# Allegro board unnamed.brd
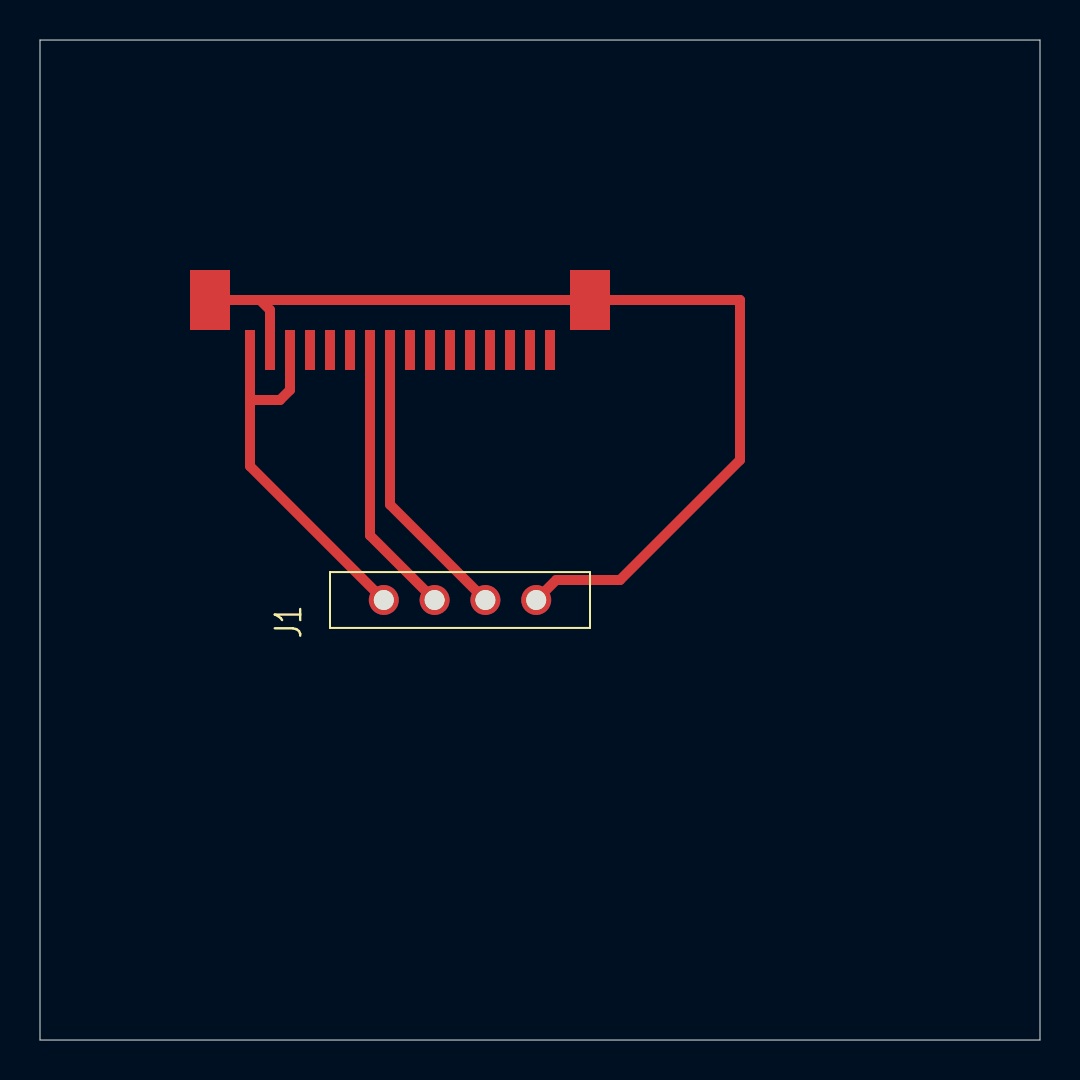
[diagram p0: board, top side]
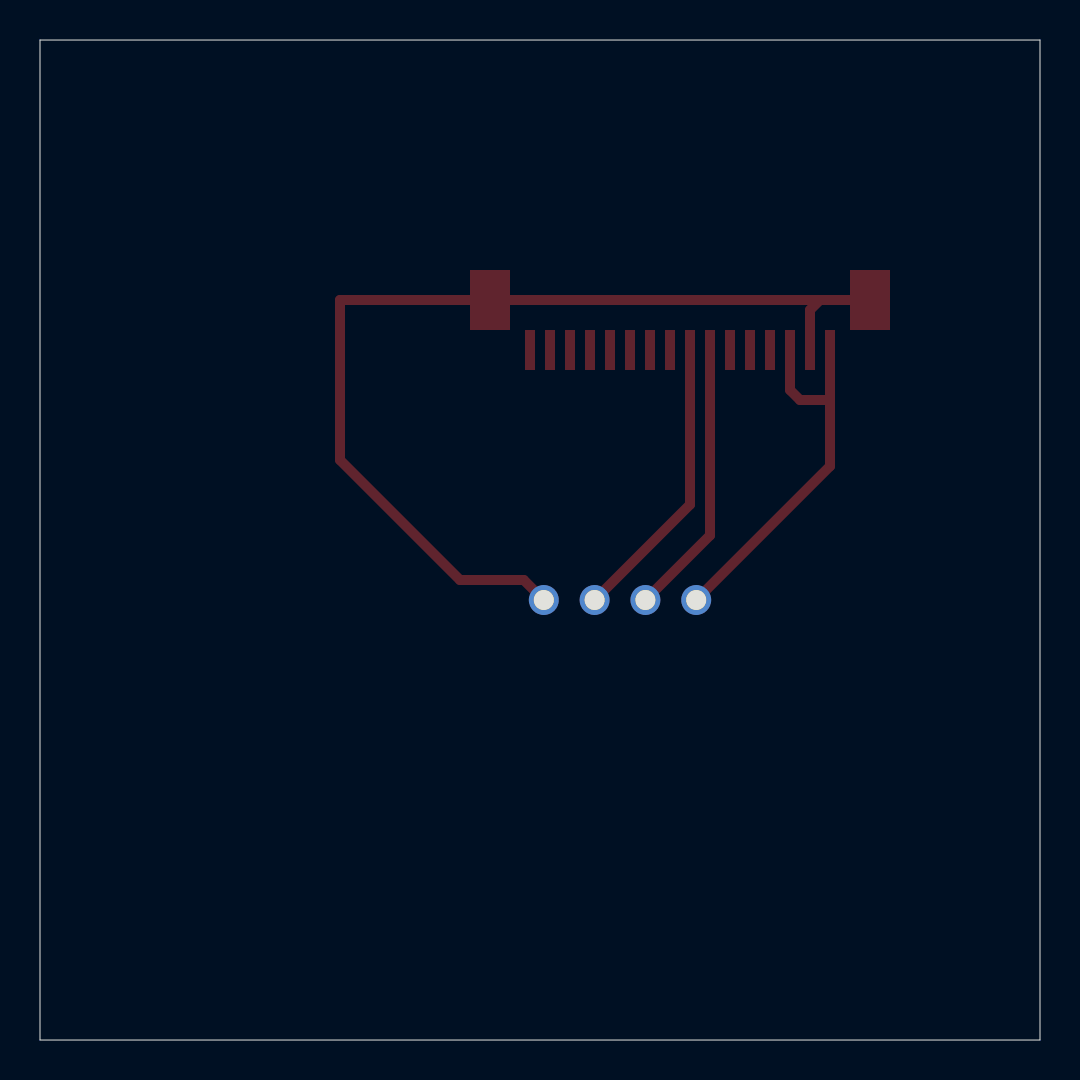
[diagram p1: board, bottom side, seen from below]

Outline 50 x 50 mm; copper layers: TOP, BOTTOM. Coordinates in mm from the lower left corner of the outline.
Outline path: 0,50 50,50 50,0 0,0 0,50

## Placement (name value [footprint] x y rotation side)
J1  4 HEADER  [HEADER4]  21 22 90 top
J2  J2  [FPC16]  14 37 0 top

## Library data of the parts
J1 = 4 HEADER
J2 = CON18

## Footprints (pads in the part's own frame, mm; a bottom-side part is the same pattern mirrored in y, then rotated)
FPC16
  rect 0.5x2 smd: 1(-3.5,-2.5) 2(-2.5,-2.5) 3(-1.5,-2.5) 4(-0.5,-2.5) 5(0.5,-2.5) 6(1.5,-2.5) 7(2.5,-2.5) 8(3.5,-2.5) 9(4.5,-2.5) 10(5.5,-2.5) 11(6.5,-2.5) 12(7.5,-2.5) 13(8.5,-2.5) 14(9.5,-2.5) 15(10.5,-2.5) 16(11.5,-2.5)
  rect 2x3 smd: 17(-5.5,0) 18(13.5,0)
HEADER4
  round 1.5 hole 1: 1(0,3.81) 2(0,1.27) 3(0,-1.27) 4(0,-3.81)

## Nets
3.3V: J1.1 J2.1 J2.3
GND: J1.4 J2.2 J2.17 J2.18
D0: J2.16
D1: J2.15
D2: J2.14
D3: J2.13
D4: J2.12
D5: J2.11
D6: J2.10
D7: J2.9
HSYNC: J2.4
SCK: J1.2 J2.7
SDA: J1.3 J2.8
VCLK: J2.5
VSYNC: J2.6

## Routing (per net, layer and track width the routed paths; a pad name or vN(x,y) marks a point on that pad's centre or on a via; arc(x,y) is an arc through that point)
3.3V: length 19.5
  TOP w0.5: J2.3 12.5,32.5 12,32 10.63,32 10.5,31.87 ; 10.5,31.87 J2.1 ; 10.5,31.87 10.5,28.69 J1.1
GND: length 50.3
  TOP w0.5: J1.4 25.81,23 29,23 35,29 35,37 J2.18 11,37 ; 11,37 11.5,36.5 J2.2 ; 11,37 J2.17
SCK: length 13.8
  TOP w0.5: J2.7 16.5,25.23 J1.2
SDA: length 14.5
  TOP w0.5: J1.3 17.5,26.77 J2.8
